# Altium PCB PCB1.PcbDoc
Units mil, origin at the board's own origin, x right, y up, seen from the top; angles counter-clockwise.
Board outline 6000 x 4000 mil, 2 copper layers (Top Layer, Bottom Layer); 21 components, 16 nets, 106 pads, 0 vias.
Unrouted connection lines stored in the file: 7.
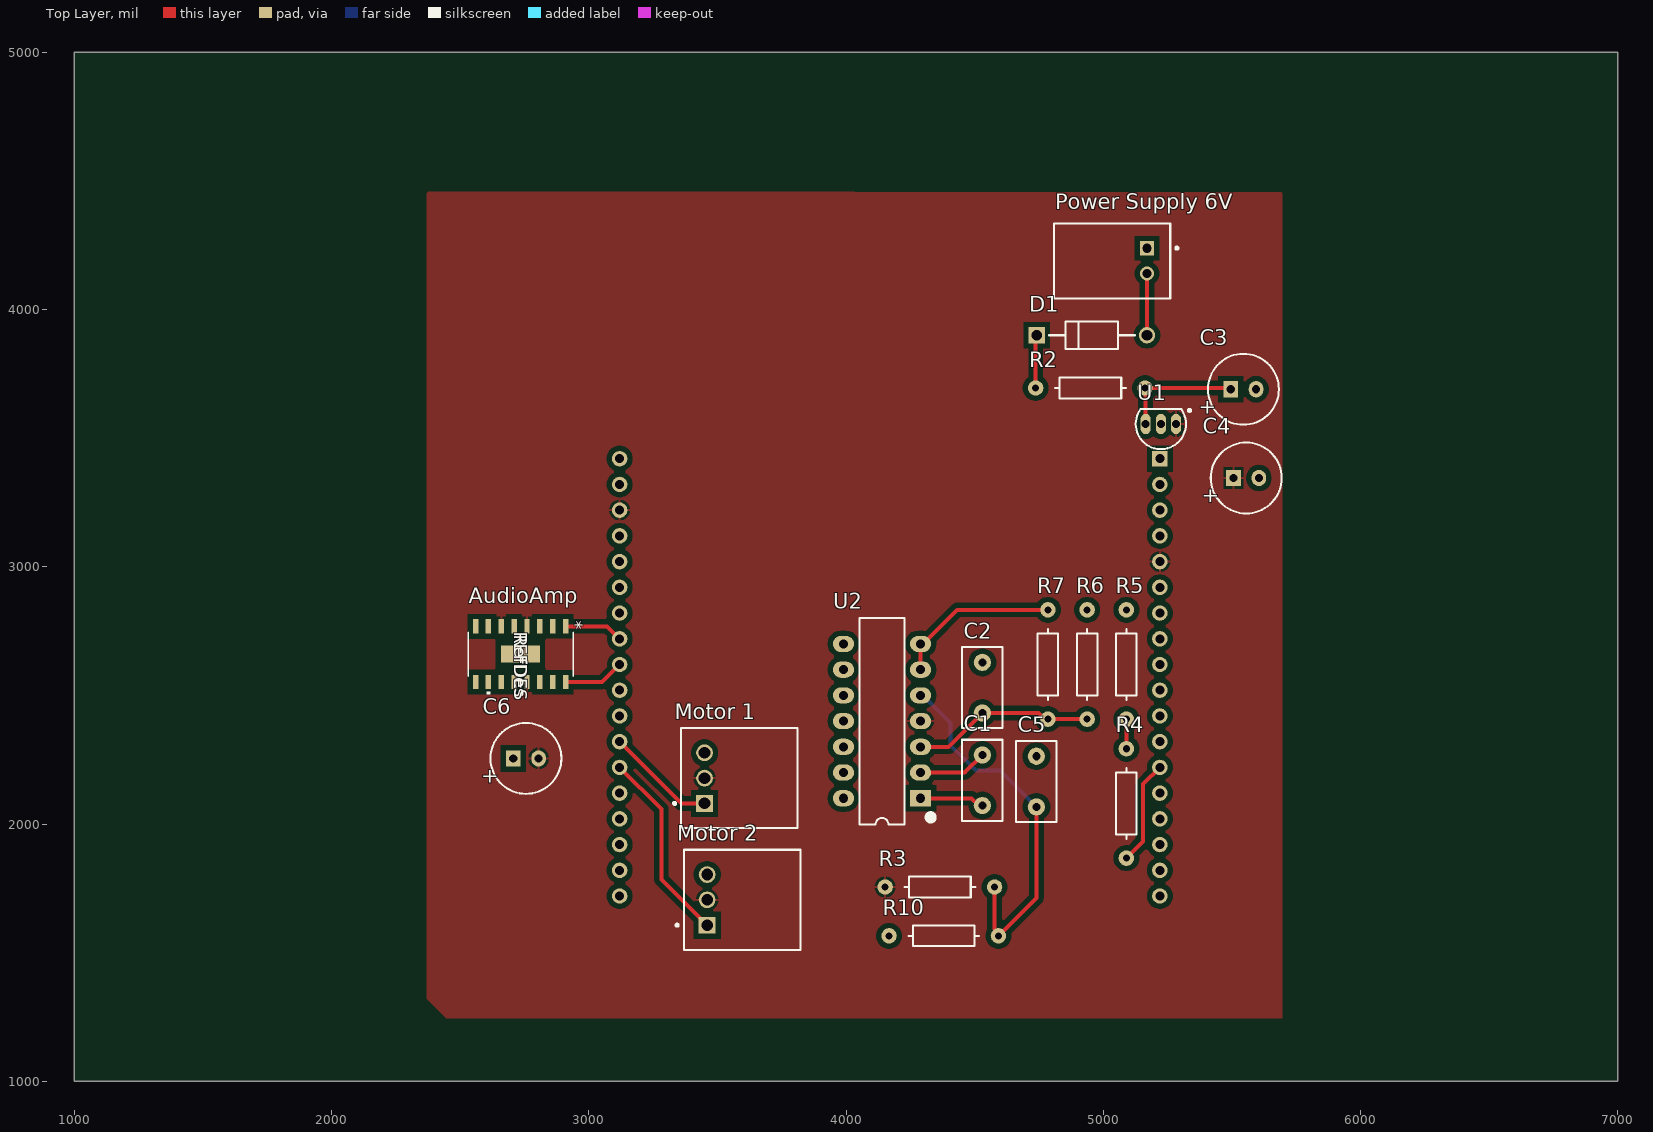
[diagram p0: Top Layer view]
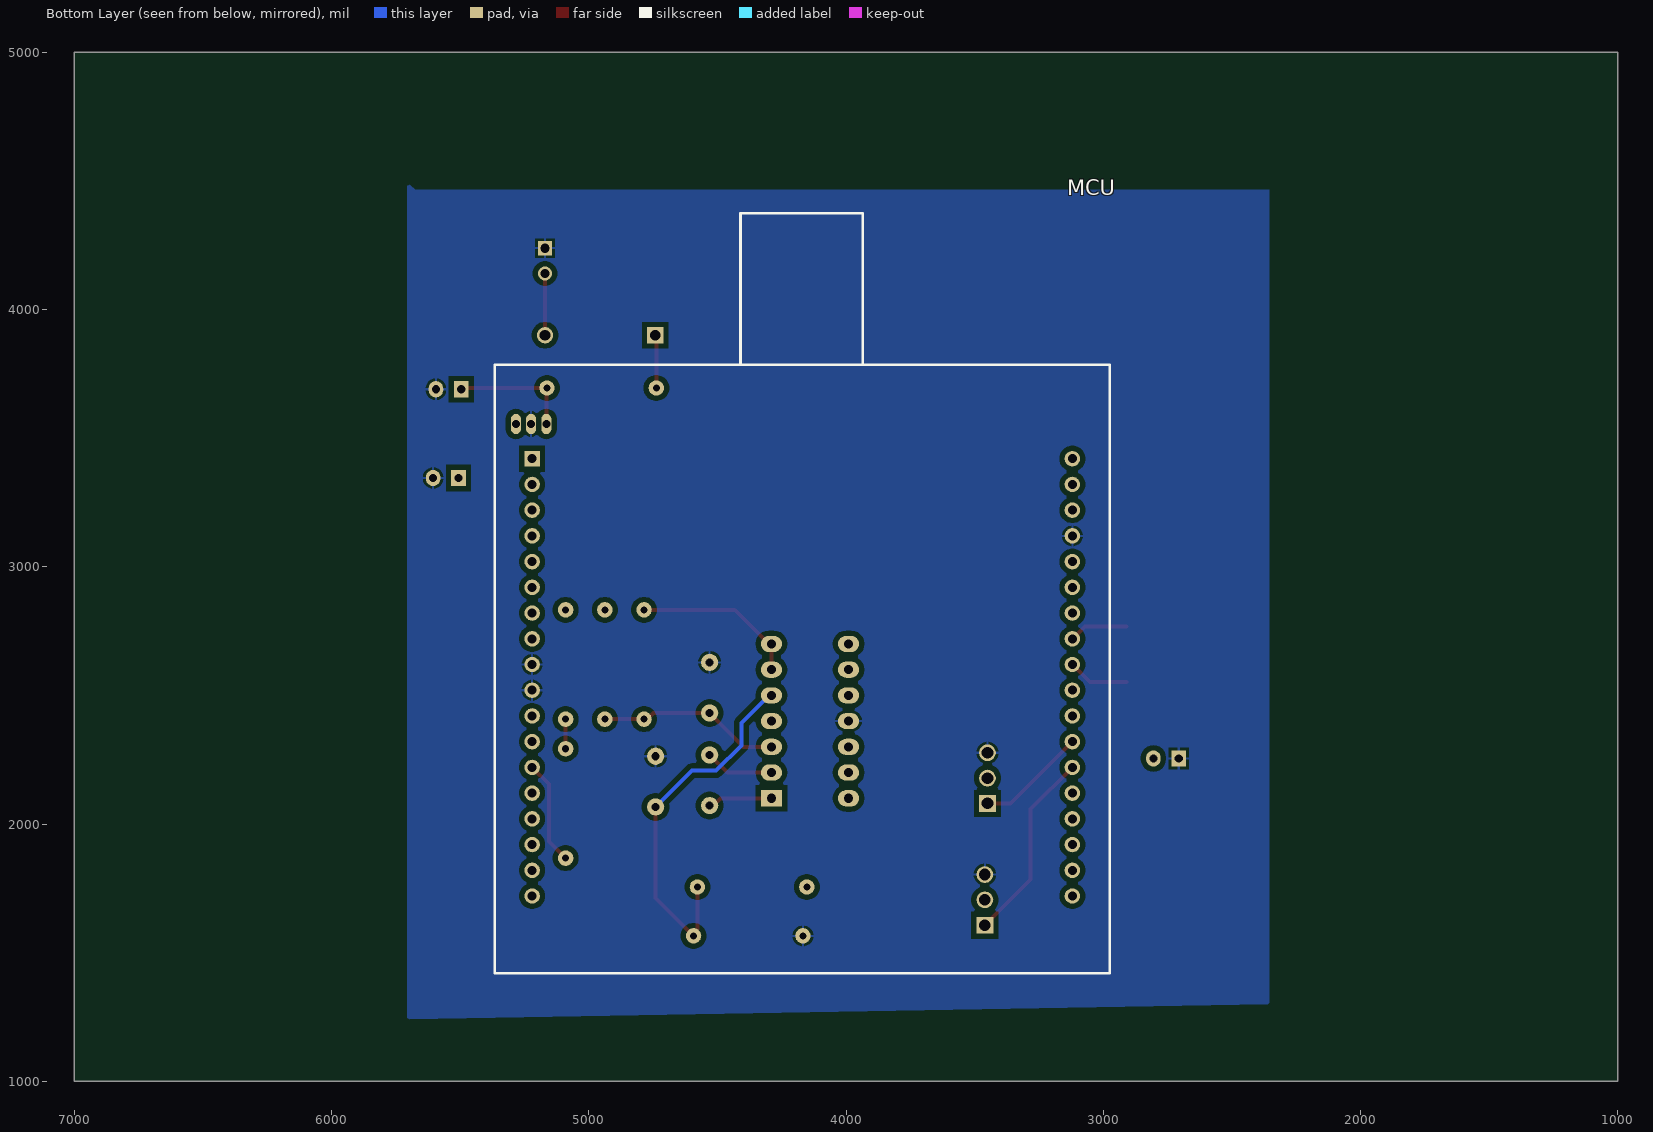
[diagram p1: Bottom Layer view, seen from below]
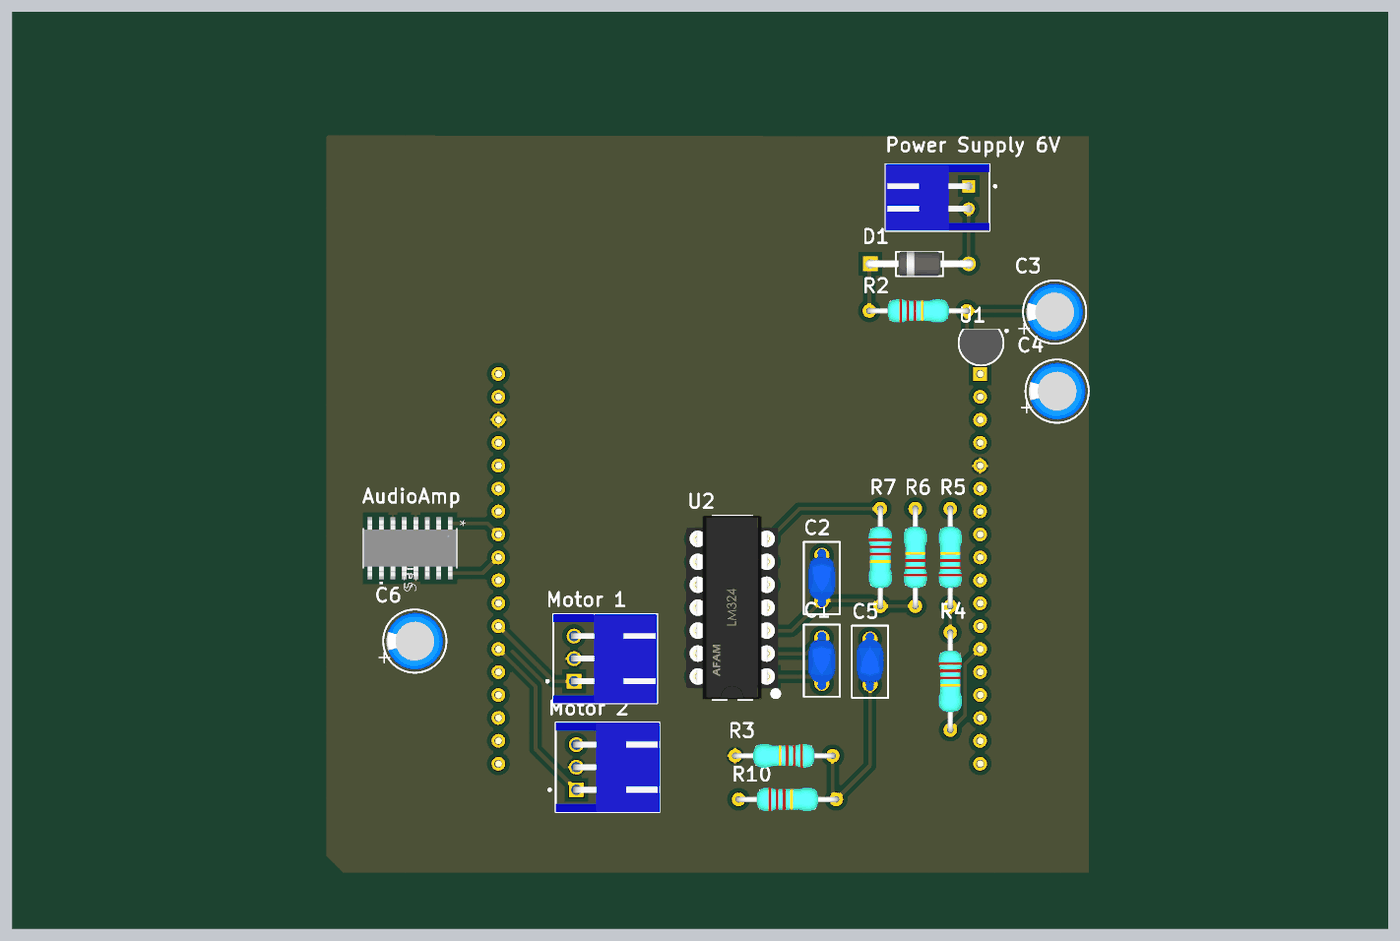
[diagram p2: 3D render of the assembled board from above, using the file's embedded part models]

## Layer stack, top to bottom
Top Solder: solder mask 0.4, Solder Resist, Dk 3.5
Top Layer: signal copper 1.4
Dielectric 1: dielectric 12.6, FR-4, Dk 4.8
Bottom Layer: signal copper 1.4
Bottom Solder: solder mask 0.4, Solder Resist, Dk 3.5

## Board outline
1000,1000 7000,1000 7000,5000 1000,5000

## Design rules (kind name [scope] priority, off if disabled: settings)
Clearance [All] p1: gap=19.68 ignorepadtopadclearanceinfootprint=FALSE
PolygonConnect [All] p1: connectstyle=Relief reliefconductorwidth=10 reliefentries=4 polygonreliefangle="90 Angle" airgapwidth=10
RoutingVias [All] p1: holewidth=28 width=50 viastyle="Through Hole" minholewidth=28 minwidth=50 maxholewidth=28 maxwidth=50
SolderMaskExpansion [All] p1: expansion=4 istentingtop=FALSE
SupplyNets "Schematic Supply Nets_9" [InNet('Vmp')] p1: voltage=0.000
SupplyNets "Schematic Supply Nets_8" [InNet('V2.1')] p2: voltage=0.000
SupplyNets "Schematic Supply Nets_7" [InNet('Vmn')] p3: voltage=0.000
SupplyNets "Schematic Supply Nets_6" [InNet('Vrc')] p4: voltage=0.000
SupplyNets "Schematic Supply Nets_5" [InNet('Vmica')] p5: voltage=0.000
SupplyNets "Schematic Supply Nets_4" [InNet('Vlc')] p6: voltage=0.000
SupplyNets "Schematic Supply Nets_3" [InNet('GND')] p7: voltage=0.000
SupplyNets "Schematic Supply Nets_2" [InNet('Vm1')] p8: voltage=0.000
SupplyNets "Schematic Supply Nets_1" [InNet('+5')] p9: voltage=0.000
SupplyNets "Schematic Supply Nets" [InNet('Vm2')] p10: voltage=0.000
Width [All] p1: maxlimit=39.37 minlimit=10 preferedwidth=10
30 further rules are at their usual default settings.

## Components (designator, comment, footprint, x,y, rotation, side; value= is the part's Value field where it differs from the comment)
AudioAmp "PAM8406ER" PAM8406ER_DIO 2735,2660 r270 top
C1 "*" CCAP-5P0 4530,2170 r270 top
C2 "*" CCAP-5P0 4530,2530 r270 top
C3 "*" "CAP-RAD-2.5mm Pitch" 5545,3690 r0 top
C4 "*" "CAP-RAD-2.5mm Pitch" 5555.79,3345 r0 top
C5 "*" CCAP-5P0 4740,2165 r90 top
C6 "*" "CAP-RAD-2.5mm Pitch" 2755.79,2255 r0 top
D1 "1N4007" 1N4007-MFG 4955.91,3900 r0 top
MCU "ATmega328PB Xplained Mini Header" "ATmeg328P Xplained" 4170,2570 r180 bottom
"Motor 1" "S3B-XH-A(LF)(SN)" JST-S3B-XH-A(LF)(SN)_V 3450,2178.43 r90 top
"Motor 2" "S3B-XH-A(LF)(SN)" JST-S3B-XH-A(LF)(SN)_V 3460,1705 r90 top
"Power Supply 6V" "S2B-XH-A(LF)(SN)" JST-S2B-XH-A(LF)(SN)_V 5170,4189.21 r270 top
R2 "*" AXIAL-0.4 4950,3695 r0 top
R3 "*" AXIAL-0.4 4365,1755 r180 top
R4 "*" AXIAL-0.4 5089.99,2080 r270 top
R5 "*" AXIAL-0.4 5090,2620 r90 top
R6 "*" AXIAL-0.4 4937.5,2620 r90 top
R7 "*" AXIAL-0.4 4784.99,2620 r270 top
R10 "*" AXIAL-0.4 4380,1565 r0 top
U1 "L78L05ACZ" TO-92 5224.06,3555 r90 top
U2 "LM324" DIP-14 4140,2400 r180 top

## Footprints (in the part's own frame and the unit in brackets; to place one, negate y for a bottom-side part, rotate by r counter-clockwise, add the part's x,y. Pads: shape width x height; smd on the part's side, far side on the other; paste and mask are expansions set on the pad)
1N4007-MFG [mm]
  round 1.6 hole 1.05 paste-2539.97 mask+0: 1(5.438,0)
  rect 1.6x1.6 hole 1.05 paste-2539.97 mask+0: 2(-5.438,0)
  silkscreen extent -4.24,-1.35 4.24,1.35, body extent -6.34,-1.45 6.34,1.45, height 0.25
"ATmeg328P Xplained" [mil]
  rect 60x60 hole 35: 1(-1050,850)
  round 60 hole 35: 2(-1050,750) 3(-1050,650) 4(-1050,550) 5(-1050,450) 6(-1050,350) 7(-1050,250) 8(-1050,150) 9(-1050,50) 10(-1050,-50) 11(-1050,-150) 12(-1050,-250) 13(-1050,-350) 14(-1050,-450) 15(-1050,-550) 16(-1050,-650) 17(-1050,-750) 18(-1050,-850) 19(1050,-850) 20(1050,-750) 21(1050,-650) 22(1050,-550) 23(1050,-450) 24(1050,-350) 25(1050,-250) 26(1050,-150) 27(1050,-50) 28(1050,50) 29(1050,150) 30(1050,250) 31(1050,350) 32(1050,450) 33(1050,550) 34(1050,650) 35(1050,750) 36(1050,850)
  silkscreen extent -1195,-1150 1195,1805, body extent -1201,-1150 1161,1845, height 452
AXIAL-0.4 [mil]
  round 60 hole 27.56: 1(-212.6,0) 2(212.6,0)
  silkscreen extent -138,-40 138,40, body extent -224,-51 224,51, height 106
"CAP-RAD-2.5mm Pitch" [mm] "Cap 6.3 X 11.2"
  rect 1.45x1.6 hole 0.8: 1(-1.25,0)
  oval 1.45x1.6 hole 0.8: 2(1.25,0)
  silkscreen extent -3.5,-3.5 3.5,3.5, body extent -3.15,-3.15 3.15,3.15, height 11.5
CCAP-5P0 [mm]
  round 1.7 hole 0.8: 1(-2.5,0) 2(2.5,0)
  silkscreen extent -4,-2 4,2, body extent -3.25,-1.5 3.25,1.5, height 6.5
DIP-14 [mm] "DIP; 14 Leads; Row Spacing 7.62 mm; Pitch 2.54 mm"
  rect 2.1x1.6 hole 0.9: 1(-3.81,7.62)
  oval 2.1x1.6 hole 0.9: 2(-3.81,5.08) 3(-3.81,2.54) 4(-3.81,0) 5(-3.81,-2.54) 6(-3.81,-5.08) 7(-3.81,-7.62) 8(3.81,-7.62) 9(3.81,-5.08) 10(3.81,-2.54) 11(3.81,0) 12(3.81,2.54) 13(3.81,5.08) 14(3.81,7.62)
  silkscreen extent -5.1,-10.2 2.2,10.2, body extent -5.07,-10.2 5.09,10.12, height 9.47
JST-S2B-XH-A(LF)(SN)_V [mm] "Header, 2-Leads, Body 7.4x11.5mm, Pitch 2.5mm"
  rect 1.4x1.4 hole 0.9: 1(-1.25,0)
  round 1.4 hole 0.9: 2(1.25,0)
  silkscreen extent -3.7,-9.2 3.7,3.08, body extent -3.7,-9.2 3.7,2.3, height 5.95
JST-S3B-XH-A(LF)(SN)_V [mm] "Header, 3-Leads, Body 9.9x11.5mm, Pitch 2.5mm"
  rect 1.65x1.65 hole 1.15: 1(-2.5,0)
  round 1.65 hole 1.15: 2(0,0) 3(2.5,0)
  silkscreen extent -4.95,-9.2 4.95,3.07, body extent -4.95,-9.2 4.95,2.3, height 6.15
PAM8406ER_DIO [mil]
  rect 55.55x21 smd paste+0 mask+0: 1(-108.27,175) 2(-108.27,125) 3(-108.27,75) 4(-108.27,25) 5(-108.27,-25) 6(-108.27,-75) 7(-108.27,-125) 8(-108.27,-175) 9(108.27,-175) 10(108.27,-125) 11(108.27,-75) 12(108.27,-25) 13(108.27,25) 14(108.27,75) 15(108.27,125) 16(108.27,175)
  rect 66x152 smd paste-75.5 mask+0: EPAD(0,0)
  silkscreen extent -86,-204 156,204, body extent -122,-199 122,199, height 69
TO-92 [mm] "TO, Flat Index; 3 In-Line, Axial Leads; Body Dia. 4.5mm; Leads 0.51 x 0.48 mm (max)"
  oval 2x1 hole 0.8: 1(0,-1.5) 2(0,0) 3(0,1.5)
  silkscreen extent -2.48,-2.96 1.5,2.48, body extent -2.4,-2.4 1.53,2.4, height 6.73

## Part data
AudioAmp: "Description", Manufacturer_Name="Diodes Inc", Copyright="Copyright (C) 2025 Ultra Librarian. All rights reserved.", Manufacturer_Part_Number=PAM8406ER, RefDes=RefDes, Type=Type
C1 C2 C5: library part CerCap_TH_5P0, "TH ceramic capacitor with 5mm pitch"
C3 C4 C6: library part ElecCap_TH_2P0, "Electrolytic capacitor with radial package, 2mm pitch and 5.2mm diameter", LatestRevisionDate=17-Jul-2002, LatestRevisionNote="Re-released for DXP Platform.", PackageDescription="Polarized Capacitor; 2 Leads", PackageReference=POLAR0.8, Published=8-Jun-2000, Publisher="Altium Limited"
D1: library part 1N4007_TH_4AX0, "1N4007 1000V standard axial diode", Supplier Part Number 1=1N4007RLGOSCT-ND, ComponentLink1Description=https://www.fairchildsemi.com/datasheets/1N/1N914.pdf, ComponentLink1URL=https://www.fairchildsemi.com/datasheets/1N/1N914.pdf, Supplier 1=Digi-Key
MCU: library part ATmega328PBXplained_TH, "Dual 18-pin headers connecting to ATmega328PB Xplained Mini", Manufacturer="Microchip Technology", Manufacturer Part Number=ATMEGA328PB-XMINI, Operating System=-, Supplier Part Number 1=ATMEGA328PB-XMINI-ND, Board Type="Evaluation Platform", Category="Development Boards, Kits, Programmers", ComponentLink1Description=http://www.microchip.com/mymicrochip/filehandler.aspx?ddocname=en589665, ComponentLink1URL=http://www.microchip.com/mymicrochip/filehandler.aspx?ddocname=en589665, Contents=Board(s), Core Processor=AVR, For Use With/Related Products=ATmega328P, Mounting Type=Fixed, Part Status=Active, Platform="ATmega328P Xplained Mini", Pricing 1="1=15.11 (NZD)", RoHS="RoHS Compliant", Stock 1=454, Supplier 1=Digi-Key, Type="MCU 8-Bit"
"Motor 1" "Motor 2": library part CMP-002-00033-2, "Male Header, Pitch 2.5 mm, 1 x 3 Position, Height 6.1 mm, Tail Length 3.4 mm, -25 to 85 degC, RoHS, Bulk", Manufacturer=JST, Max Operating Temperature=85°C, Min Operating Temperature=-25°C, Package Description="Male Header, Pitch 2.5 mm, 1 x 3 Position, Height 6.1 mm, Tail Length 3.4 mm", Case/Package=S3B-XH-A(LF)(SN), Connector Type=Header, Datasheet URL=http://www.jst-mfg.com/product/pdf/eng/eXH.pdf, Datasheet Version=May-16, Gender=Male, Manufacturer URL=http://www.jst.com/home2.html, Mounting Technology=TH, Package Reference=S3B-XH-A(LF)(SN), RoHS Compliant=Unknown
"Power Supply 6V": library part CMP-002-00032-2, "Male Header, Pitch 2.5 mm, 1 x 2 Position, Height 6.1 mm, Tail Length 3.4 mm, -25 to 85 degC, RoHS, Bulk", Manufacturer=JST, Max Operating Temperature=85°C, Min Operating Temperature=-25°C, Package Description="XH Series Disconnectable Crimp Style Connector, Pitch 2.5 mm, 1 x 2 Position, Height 6.1 mm, Tail Length 3.4 mm", Case/Package=S2B-XH-A(LF)(SN), Connector Type=Header, Datasheet URL=http://www.jst-mfg.com/product/pdf/eng/eXH.pdf, Datasheet Version=May-16, Gender=Male, Manufacturer URL=http://www.jst.com/home2.html, Mounting Technology=TH, Package Reference=S2B-XH-A(LF)(SN), RoHS Compliant=Unknown
R2 R3 R4 R5 R6 R7 R10: library part Res_TH_0AX4, "Through hole resistor", ComponentLink1Description=http://www.royalohm.com/pdf/product2017/PrecisionMetalMF.pdf, LatestRevisionDate=17-Jul-2002, LatestRevisionNote="Re-released for DXP Platform.", PackageReference=AXIAL-0.4, Published=8-Jun-2000, Publisher="Altium Limited"
U1: library part L78L05_TH_TO92, "Voltage Regulator 5V", Base Part Number=LM78L05, Current - Output=100mA, Manufacturer="ON Semiconductor", Manufacturer Part Number=LM78L05ACZX, Operating Temperature="-40°C ~ 125°C", Package / Case="TO-226-3, TO-92-3 (TO-226AA) (Formed Leads)", Supplier Device Package=TO-92-3, Supplier Part Number 1=LM78L05ACZXCT-ND, Voltage - Input (Max)=30V, Voltage - Output (Max)=-, Voltage - Output (Min/Fixed)=5V, Category="Integrated Circuits (ICs)", ComponentLink1Description=https://www.fairchildsemi.com/datasheets/MC/MC78L05A.pdf, ComponentLink1URL=https://www.fairchildsemi.com/datasheets/MC/MC78L05A.pdf, Control Features=-, Mounting Type="Through Hole", Output Configuration=Positive, Output Type=Fixed, Packaging="Cut Tape (CT)", Part Status=Active, Pricing 1="1=0.69, 10=0.517, 100=0.3226, 500=0.2207, 1000=0.16976 (NZD)", Protection Features="Over Temperature, Short Circuit", PSRR="80dB (120Hz)", RoHS="RoHS Compliant", Stock 1=7782, Supplier 1=Digi-Key, Voltage Dropout (Max)=-
U2: library part LM324N_TH_DIP16, "IC OPAMP GP 14DIP", Current - Supply=1mA, Manufacturer="ON Semiconductor", Manufacturer Part Number=LM324N, Operating Temperature="0°C ~ 70°C", Package / Case="14-DIP (0.300\", 7.62mm)", Supplier Device Package=14-DIP, Supplier Part Number 1=LM324NFS-ND, Voltage - Supply, Single/Dual (±)="3 V ~ 32 V, ±1.5 V ~ 16 V", Amplifier Type="General Purpose", Base Part Number=LM324, Category="Integrated Circuits (ICs)", ComponentLink1Description=https://www.fairchildsemi.com/datasheets/LM/LM2902.pdf, ComponentLink1URL=https://www.fairchildsemi.com/datasheets/LM/LM2902.pdf, Mounting Type="Through Hole", Output Type=-, Packaging=Tube, Part Status=Active, Pricing 1="1=0.9, 10=0.775, 100=0.5789, 500=0.45482, 1000=0.35145 (NZD)", RoHS="RoHS Compliant", Slew Rate=-, Stock 1=2900, Supplier 1=Digi-Key

## Nets (pads, with @x,y where several pads share a name; then routed paths per layer and width w, separated by ;. In a path a pad name is that pad's centre, name@x,y a point inside that pad or via, vN(x,y) a via of type N, cw(c..) or ccw(c..) an arc to the next point about the centre after c; other vN are vias at no path point)
+5: "Motor 1.2" "Motor 2.2" AudioAmp.4 AudioAmp.6 AudioAmp.13 C4.1 C6.2 MCU.5 MCU.34 R3.2 U1.1 U2.4
GND: "Motor 1.3" "Motor 2.3" "Power Supply 6V.1" AudioAmp.2 AudioAmp.3 AudioAmp.11 AudioAmp.14 AudioAmp.15 C2.1 C3.2 C4.2 C5.2 C6.1 MCU.9 MCU.10 MCU.33 R10.1 U1.2 U2.11
NetC1_1: C1.1 R4.1 R5.1 U2.2 | length 383.1
  Top Layer w15.75: U2.2 4461.57,2200 C1.1 ; R4.1 R5.1
NetC2_2: C2.2 R6.1 R7.2 U2.3 | length 712
  Top Layer w15.75: U2.3 4398.43,2300 C2.2 4748.85,2431.57 4773.02,2407.4 R7.2 R6.1
NetC3_1: C3.1 R2.2 U1.3 | length 476.3
  Top Layer w15.75: U1.3 5163.8,3556.2 5163.8,3693.8 R2.2 5490.79,3695 C3.1
NetC5_1: C5.1 R3.1 R10.2 U2.5 | length 1439.8
  Top Layer w15.75: R3.1 4577.6,1591.97 4592.6,1576.97 R10.2 4740,1712.4 C5.1
  Bottom Layer w15.75: U2.5 4299.84,2500 4406.8,2393.04 4406.8,2305.32 4504.72,2207.4 4599.17,2207.4 C5.1
NetD1_1: "Power Supply 6V.2" D1.1 | length 240
  Top Layer w15.75: D1.1 5170,4140
NetD1_2: D1.2 R2.1 | length 206.8
  Top Layer w15.75: R2.1 4737.4,3895.59 D1.2
V2.1: R7.1 U2.6 U2.7 | length 649.9
  Top Layer w15.75: U2.6 U2.7 4299.84,2700 4432.44,2832.6 R7.1
Vlc: AudioAmp.1 MCU.29 | length 230
  Top Layer w15.75: AudioAmp.1 3071.73,2768.27 MCU.29
Vm1: "Motor 1.1" MCU.25 | length 429.4
  Top Layer w15.75: MCU.25 3360,2080 3450,2080
Vm2: "Motor 2.1" MCU.24 | length 754.3
  Top Layer w15.75: MCU.24 3281.93,2058.07 3281.93,1784.64 3460,1606.57
Vmica: C1.2 MCU.13 R4.2 U2.1 | length 658.2
  Top Layer w15.75: U2.1 4487.73,2100 4516.15,2071.57 C1.2 ; R4.2 5155,1932.4 5155,2155 MCU.13
Vmn: R5.2
Vmp: R6.2
Vrc: AudioAmp.16 MCU.28 | length 238.3
  Top Layer w15.75: AudioAmp.16 3051.73,2551.73 MCU.28
pads on no net: AudioAmp.5 AudioAmp.7 AudioAmp.8 AudioAmp.9 AudioAmp.10 AudioAmp.12 AudioAmp.EPAD MCU.1 MCU.2 MCU.3 MCU.4 MCU.6 MCU.7 MCU.8 MCU.11 MCU.12 MCU.14 MCU.15 MCU.16 MCU.17 MCU.18 MCU.19 MCU.20 MCU.21 MCU.22 MCU.23 MCU.26 MCU.27 MCU.30 MCU.31 MCU.32 MCU.35 MCU.36 U2.8 U2.9 U2.10 U2.12 U2.13 U2.14

## Polygon pours and split planes (outlines as drawn)
+5 on Top Layer "+5_L01_P001" (solid, pour order 1): 2370,4460 2370,1320 2445,1245 5695,1245 5695,4450 5700,4455
GND on Bottom Layer "GND_L02_P000" (solid, pour order 0): 2360,1300 2355,1305 2355,4465 5675,4465 5705,4495 5705,1240

## Text inside footprints (layer, text, board x,y; h text height)
AudioAmp: Top Overlay "RefDes" at 2710,2735 h50 r270; Top Overlay "*" at 2926,2790.77 h50 r270; Top Overlay "REFDES" at 2710,2747.5 h50 r270; Mechanical 13 "RefDes2" at 2710,2747.5 h50 r270; Mechanical 13 "*" at 2881,2738 h50 r270
C3: Top Overlay "+" at 5371.77,3595.51 h59.06
C4: Top Overlay "+" at 5382.56,3250.51 h59.06
C6: Top Overlay "+" at 2582.56,2160.51 h59.06